# EAGLE board Version 3 (EAGLE 7.3.0)
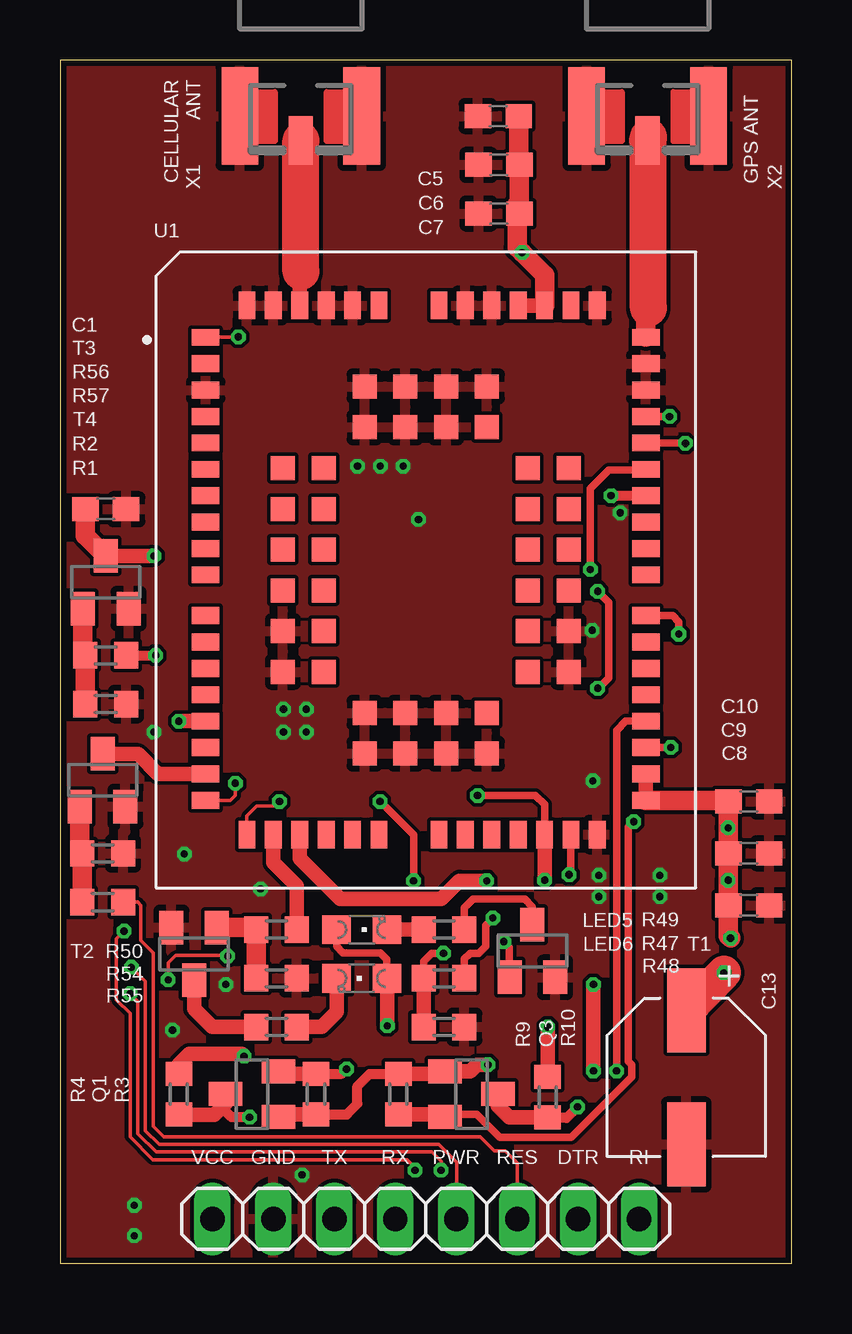
[diagram p0: board, top side]
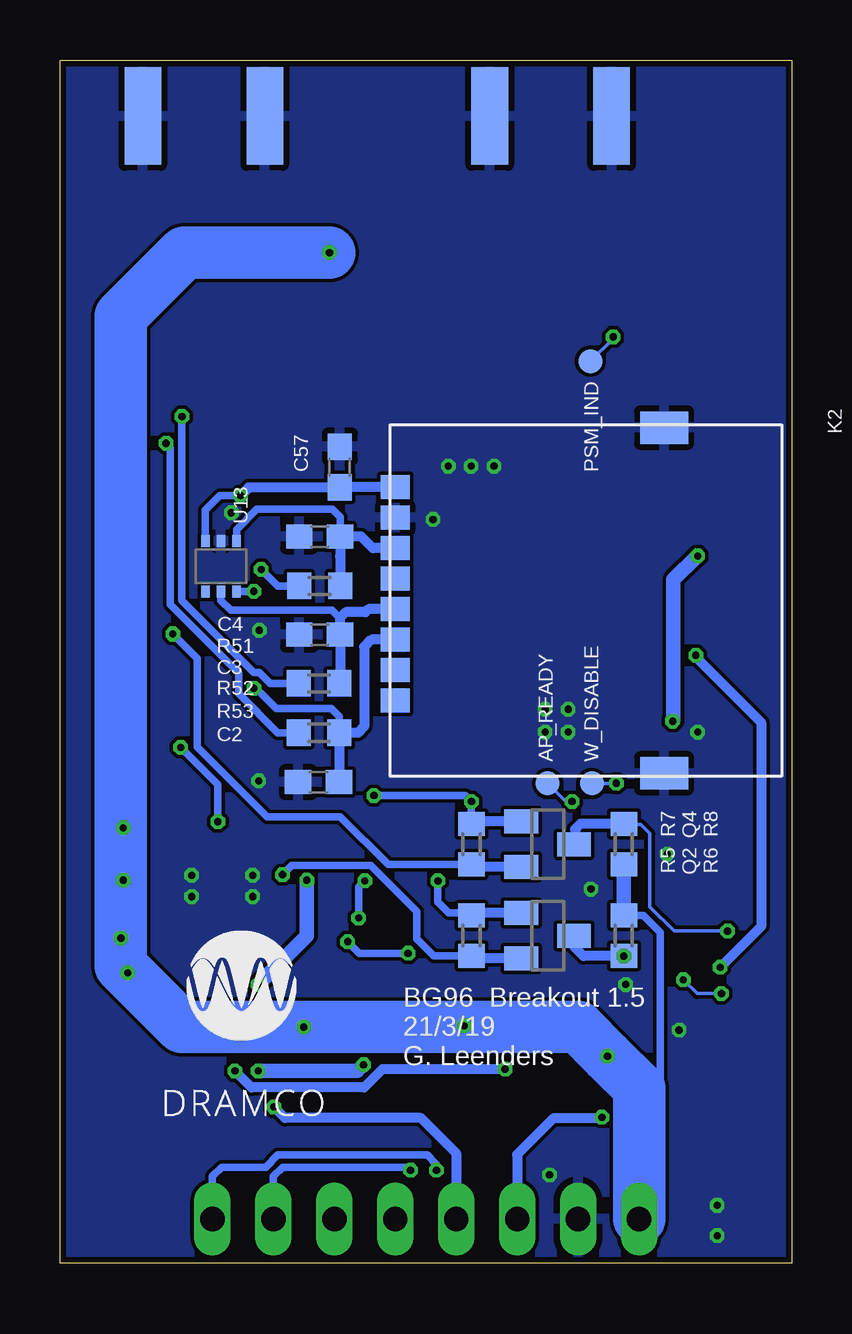
[diagram p1: board, bottom side, seen from below]

Size 30.48 x 50.15 mm. Coordinates in mm from the lower left corner, seen from the top.
Outline: 0,0 30.48,0 30.48,50.15 0,50.15 0,0
Copper layers (1*16): Top 0.035mm / dielectric 1.5mm / Bottom 0.035mm
Design rules "SeeedStudio_2layer_DRU_no_angle_20140221": minimum track width 6mil, minimum drill 12mil, track to track 6mil, track to pad 6mil, pad to pad 6mil, via to via 6mil, smd to smd 0mil, copper to edge 10mil, drill to drill 10mil, minimum pad ring 10mil, minimum via ring 6mil, stop-mask expansion 2mil, vias tented up to drill 100mil, thermal gap 10mil

## Footprints (pad centres in the part's own frame; a part is rotated, then mirrored left to right if it is on the bottom)
TP10R = smd 1 x 1: TP 0,0
C0603 = smd 1.1 x 1: 1 -0.85,0; 2 0.85,0
3.5X1.6X2.1(BXCXA) = smd 3.5 x 1.6: 1 2.8,0; 2 -2.8,0
1X08 = drill 1.016 long: 1 -8.89,0; 2 -6.35,0; 3 -3.81,0; 4 -1.27,0; 5 1.27,0; 6 3.81,0; 7 6.35,0; 8 8.89,0
693022010811 = smd 1 x 1.2: C1 -4.72,0; C2 -2.18,0; C3 0.36,0; C4 2.9,0; C5 -3.45,0; C6 -0.91,0; C7 1.63,0; C8 4.17,0 | smd 1.35 x 2: Z1 7.2,11.2; Z2 -7.2,11.2
CHIPLED_0805 = smd 1.2 x 1.2: A 0,-1.05; C 0,1.05
SOT23 = smd 1 x 1.4: 1 -0.95,-1.1; 2 0.95,-1.1; 3 0,1.1
R0603 = smd 1 x 1.1: 1 -0.85,0; 2 0.85,0
LTE_MODULE_BG96 = smd 1.15 x 0.7: 1 -9.175,9.7; 2 -9.175,8.6; 3 -9.175,7.5; 4 -9.175,6.4; 5 -9.175,5.3; 6 -9.175,4.2; 7 -9.175,3.1; 8 -9.175,2; 9 -9.175,0.9; 10 -9.175,-0.2; 11 -9.175,-1.9; 12 -9.175,-3; 13 -9.175,-4.1; 14 -9.175,-5.2; 15 -9.175,-6.3; 16 -9.175,-7.4; 17 -9.175,-8.5; 18 -9.175,-9.6; 32 9.175,-9.6; 33 9.175,-8.5; 34 9.175,-7.4; 35 9.175,-6.3; 36 9.175,-5.2; 37 9.175,-4.1; 38 9.175,-3; 39 9.175,-1.9; 40 9.175,-0.2; 41 9.175,0.9; 42 9.175,2; 43 9.175,3.1; 44 9.175,4.2; 45 9.175,5.3; 46 9.175,6.4; 47 9.175,7.5; 48 9.175,8.6; 49 9.175,9.7 | smd 0.7 x 1.15: 19 -7.45,-11.025; 20 -6.35,-11.025; 21 -5.25,-11.025; 22 -4.15,-11.025; 23 -3.05,-11.025; 24 -1.95,-11.025; 25 0.55,-11.025; 26 1.65,-11.025; 27 2.75,-11.025; 28 3.85,-11.025; 29 4.95,-11.025; 30 6.05,-11.025; 31 7.15,-11.025; 50 7.15,11.025; 51 6.05,11.025; 52 4.95,11.025; 53 3.85,11.025; 54 2.75,11.025; 55 1.65,11.025; 56 0.55,11.025; 57 -1.95,11.025; 58 -3.05,11.025; 59 -4.15,11.025; 60 -5.25,11.025; 61 -6.35,11.025; 62 -7.45,11.025 | smd 1 x 1: 63 -5.95,4.25; 64 -5.95,2.55; 65 -5.95,0.85; 66 -5.95,-0.85; 67 -5.95,-2.55; 68 -5.95,-4.25; 69 -2.55,-7.65; 70 -0.85,-7.65; 71 0.85,-7.65; 72 2.55,-7.65; 73 5.95,-4.25; 74 5.95,-2.55; 75 5.95,-0.85; 76 5.95,0.85; 77 5.95,2.55; 78 5.95,4.25; 79 2.55,7.65; 80 0.85,7.65; 81 -0.85,7.65; 82 -2.55,7.65; 83 -4.25,4.25; 84 -4.25,2.55; 85 -4.25,0.85; 86 -4.25,-0.85; 87 -4.25,-2.55; 88 -4.25,-4.25; 89 -2.55,-5.95; 90 -0.85,-5.95; 91 0.85,-5.95; 92 2.55,-5.95; 93 4.25,-4.25; 94 4.25,-2.55; 95 4.25,-0.85; 96 4.25,0.85; 97 4.25,2.55; 98 4.25,4.25; 99 2.55,5.95; 100 0.85,5.95; 101 -0.85,5.95; 102 -2.55,5.95
SC-70-6 = smd 0.35 x 0.5: 1 -0.65,-1.05; 2 0,-1.05; 3 0.65,-1.05; 4 0.65,1.05; 5 0,1.05; 6 -0.65,1.05
SMA_EDGELAUNCH_UFL = smd 4.064 x 1.524: GND@1 2.032,-2.54; GND@2 2.032,2.54 | smd 4.064 x 1.524 bottom: GND@3 2.032,2.54; GND@4 2.032,-2.54 | smd 2.032 x 1.016: P 3.048,0

## Placement (x,y rotation side)
AP_READY  TPTP10R  [TP10R]  10.16,20 0 bottom
C1  10n  [C0603]  1.91,31.43 0 top
C2  33p  [C0603]  19.71,20.05 180 bottom
C3  33p  [C0603]  19.66,26.2 180 bottom
C4  33p  [C0603]  19.66,30.29 180 bottom
C5  100n  [C0603]  18.26,47.82 180 top
C6  33p  [C0603]  18.29,45.78 180 top
C7  10p  [C0603]  18.29,43.75 180 top
C8  100n  [C0603]  28.7,14.92 0 top
C9  33p  [C0603]  28.7,17.08 0 top
C10  10p  [C0603]  28.7,19.24 0 top
C13  [3.5X1.6X2.1(BXCXA)]  26.1,7.75 90 top
C57  100n  [C0603]  18.82,33.19 90 bottom
JP1  [1X08]  15.24,1.84 0 top
K2  693022010811  [693022010811]  16.51,27.62 270 bottom
LED5  [CHIPLED_0805]  12.57,13.91 270 top
LED6  [CHIPLED_0805]  12.57,11.87 90 top
PSM_IND  TPTP10R  [TP10R]  8.38,37.59 0 bottom
Q1  [SOT23]  8,7.05 90 top
Q2  [SOT23]  10.16,13.65 270 bottom
Q3  [SOT23]  17.14,7.05 270 top
Q4  [SOT23]  10.16,17.46 270 bottom
R1  4.7k  [R0603]  1.78,15.05 180 top
R2  47k  [R0603]  1.78,17.08 180 top
R3  10k  [R0603]  10.67,7.05 270 top
R4  10k  [R0603]  4.95,7.05 90 top
R5  10k  [R0603]  13.34,13.65 90 bottom
R6  10k  [R0603]  6.99,13.65 90 bottom
R7  10k  [R0603]  13.34,17.46 90 bottom
R8  10k  [R0603]  6.99,17.46 270 bottom
R9  10k  [R0603]  14.1,7.05 90 top
R10  10k  [R0603]  20.32,6.92 90 top
R47  4.7k  [R0603]  16,11.87 180 top
R48  47k  [R0603]  16,9.84 180 top
R49  2K2  [R0603]  16,13.91 180 top
R50  4.7k  [R0603]  9.02,13.91 180 top
R51  22  [R0603]  19.66,28.23 0 bottom
R52  22  [R0603]  19.68,24.17 0 bottom
R53  22  [R0603]  19.68,22.11 0 bottom
R54  47k  [R0603]  9.02,11.87 180 top
R55  2k2  [R0603]  9.02,9.84 0 top
R56  4.7k  [R0603]  1.91,25.34 180 top
R57  47k  [R0603]  1.91,23.3 180 top
T1  BC847  [SOT23]  19.68,13.02 0 top
T2  BC847  [SOT23]  5.59,12.89 180 top
T3  BC847  [SOT23]  1.91,28.38 0 top
T4  BC847  [SOT23]  1.78,20.13 0 top
U1  BG96  [LTE_MODULE_BG96]  15.24,28.89 0 top
U13  SMF05C  [SC-70-6]  23.77,29.04 180 bottom
W_DISABLE  TPTP10R  [TP10R]  8.32,20 0 bottom
X1  [SMA_EDGELAUNCH_UFL]  10.03,49.85 270 top
X2  [SMA_EDGELAUNCH_UFL]  24.49,49.85 270 top

## Library data of the parts
AP_READY PSM_IND W_DISABLE = testpad
C1-C10 C57 R1-R10 R47-R57 = rcl
C13 = Kondensatoren (rev17a); WE-NUMBER: 865080545012/100uF
JP1 = pinhead
K2 = Wurth_Elektronik_Electromechanic_Input-Output_Connectors_rev15c
LED5 LED6 Q1-Q4 X1 X2 = adafruit
T1-T4 = transistor
U1 = BG96; AVAILABILITY: Unavailable; DESCRIPTION: Lte Cat.M1 Module For Global Sku; MF: Quectel; MP: BG96; PACKAGE: None; PRICE: None
U13 = Design 13

## Nets
BG96_PWR: C1.1 T3.3 U1.15
BG96_RESET: T4.3 U1.17
DTR: JP1.7 Q2.3 R6.1
DTR_1.8: Q2.2 R5.1 U1.30
GND: C1.2 C2.2 C3.2 C4.2 C5.2 C6.2 C7.2 C8.2 C9.2 C10.2 C13.2 C57.2 JP1.2 K2.C5 K2.Z1 K2.Z2 R2.1 R48.1 R54.1 R57.1 T1.2 T2.2 T3.2 T4.2 U1.3 U1.31 U1.47 U1.48 U1.50 U1.54 U1.55 U1.58 U1.59 U1.61 U1.62 U1.67 U1.68 U1.69 U1.70 U1.71 U1.72 U1.73 U1.74 U1.79 U1.80 U1.81 U1.82 U1.89 U1.90 U1.91 U1.100 U1.101 U1.102 U13.2 X1.GND@1 X1.GND@2 X1.GND@3 X1.GND@4 X2.GND@1 X2.GND@2 X2.GND@3 X2.GND@4
N$1: U1.60 X1.P
N$2: U1.49 X2.P
N$3: R1.2 R2.2 T4.1
N$4: AP_READY.TP U1.19
N$5: U1.18 W_DISABLE.TP
N$29: R56.2 R57.2 T3.1
N$30: C4.1 K2.C2 R51.2 U13.1
N$31: C3.1 K2.C3 R52.2 U13.5
N$32: C2.1 K2.C7 R53.2 U13.6
N$33: R47.2 R48.2 T1.1
N$34: R49.1 T1.3
N$35: LED5.C R49.2
N$36: R50.2 R54.2 T2.1
N$37: R55.1 T2.3
N$38: LED6.C R55.2
NETLIGHT: R47.1 U1.21
PSM_IND: PSM_IND.TP U1.1
PWR: JP1.5 R56.1
RESET: JP1.6 R1.1
RI: JP1.8 Q4.3 R8.1
RI_1.8: Q4.2 R7.1 U1.39
RX: JP1.4 Q3.3 R10.1
RX_1.8: Q3.2 R9.1 U1.34
SIM_CLK: R52.1 U1.46
SIM_DATA: R53.1 U1.45
SIM_RST: R51.1 U1.44
SIM_VDD: C57.1 K2.C1 U1.43 U13.3
STATUS: R50.1 U1.20
TX: JP1.3 Q1.3 R4.1
TX_1.8: Q1.2 R3.1 U1.35
USB_VBUS: U1.8
VBAT: C5.1 C6.1 C7.1 C8.1 C9.1 C10.1 C13.1 JP1.1 LED5.A LED6.A R4.2 R6.2 R8.2 R10.2 U1.32 U1.33 U1.52 U1.53
VDD_EXT: Q1.1 Q2.1 Q3.1 Q4.1 R3.2 R5.2 R7.2 R9.2 U1.29

## Tracks (layer width: path | path; a pad name or v marks a point on that pad's centre or on a via)
BG96_PWR  (via drill 0.3)
  Top 0.61: T3.3 3.9,29.48 v3.91,29.48 | v4.95,22.59 U1.15
  Top 0.813: C1.1 1.05,30.33 T3.3
  Bottom 0.61: v3.91,29.48 3.94,29.48 4.93,28.49 4.93,22.62 v4.95,22.59
BG96_RESET
  Top 0.61: U1.17 4.08,20.39 3.25,21.22 T4.3
DTR  (via drill 0.3)
  Top 0.152: v15.88,3.87 15.88,4.25 15.49,4.64 4,4.64 3.24,5.4 3.24,10.92 v2.92,11.24 | v4.51,11.81 4.51,12.51 4.83,12.83 6.96,12.83 R6.1
  Bottom 0.152: v2.92,11.24 3.94,11.24 v4.51,11.81
  Bottom 0.305: JP1.7 21.59,3.62 21.21,4 16,4 v15.88,3.87
  Bottom 0.406: R6.1 7.49,12.8 8.68,12.8 9.02,13.14 9.02,13.61 Q2.3
  other vias: 6.99,12.8
DTR_1.8  (via drill 0.3)
  Top 0.305: U1.30 21.29,16.27 v21.21,16.19
  Bottom 0.305: R5.1 14.9,12.8 15.62,13.53 15.62,14.67 17.53,16.57 20.83,16.57 20.89,16.51 v21.21,16.19
  Bottom 0.406: Q2.2 13.23,12.7 R5.1
GND  (via drill 0.3)
  other vias: 6.91,11.62 3.91,22.14 14.94,31 23.34,31.28 22.17,26.38 3.1,1.14 3.1,2.41 10.08,3.68 4.69,9.72 9.31,23.09 9.31,22.14 10.26,23.09 10.26,22.14 14.3,33.22 13.35,33.22 12.4,33.22 22.45,16.17 22.45,15.28 24.99,16.17 24.99,15.28 5.18,17.06 22.2,20.1 8.36,15.6
  pour Bottom: -6.35,-5.4 -6.35,73.34 71.12,73.34 71.12,-11.75 -6.35,-11.75
  pour Top: 71.12,-5.4 71.12,73.34 -6.35,73.34 -6.35,-11.75 71.12,-11.75
N$1
  Top 0.61: U1.60 9.99,41.04 10.03,41.34
  Top 1.54: 10.03,41.34 X1.P
N$2
  Top 0.813: U1.49 24.41,39.53 24.51,39.81
  Top 1.54: 24.51,39.81 24.51,46.95 X2.P
N$3
  Top 0.813: T4.1 0.83,17.18 R2.2 R1.2
N$4  (via drill 0.3)
  Top 0.152: U1.19 7.79,18.65 8.19,19.05 8.95,19.05 v9.14,19.24
  Bottom 0.152: v9.14,19.24 9.4,19.24 AP_READY.TP
N$5  (via drill 0.3)
  Top 0.152: U1.18 7.1,19.29 7.3,19.49 v7.3,20
  Bottom 0.152: v7.3,20 W_DISABLE.TP
N$29
  Top 0.813: T3.1 0.95,25.44 R56.2 R57.2
N$30
  Bottom 0.305: C4.1 18.8,30.3 18.8,31.1 19.13,31.43 22.28,31.43 23.12,30.58 U13.1
  Bottom 0.406: K2.C2 17.45,29.8 17.93,30.29 C4.1 | C4.1 R51.2 | C4.1 18.81,29.46
N$31
  Bottom 0.305: U13.5 23.77,27.62 23.37,27.22 19.15,27.22 18.82,26.89
  Bottom 0.406: K2.C3 17.63,27.26 17.75,27.14 18.57,27.14 18.82,26.89 18.82,26.21 C3.1 18.81,24.19 R52.2
N$32  (via drill 0.3)
  Top 0.305: v22.4,23.96 22.43,23.96 22.86,24.4 22.86,27.55 v22.4,28
  Bottom 0.305: U13.6 22.41,27.99 v22.4,28 | v22.4,23.96 22.4,24.07 21.46,23.13 19.18,23.13 18.85,22.8 18.85,22.12 R53.2
  Bottom 0.406: 18.85,22.12 18.85,20.07 C2.1 | K2.C7 17.5,25.99 17.8,25.69 17.8,22.36 18.06,22.11 R53.2
N$33  (via drill 0.3)
  Top 0.305: 15.15,12.07 R47.2 15.15,12.57 15.49,12.92 v15.98,12.92 | v18.49,13.4 18.72,13.17 T1.1
  Top 0.61: R47.2 R48.2
  Bottom 0.305: v15.98,12.92 18.01,12.92 v18.49,13.4
N$34
  Top 0.305: R49.1 16.85,14.81 17.22,15.18 19.36,15.18 19.68,14.85 T1.3
  Top 0.406: 19.47,13.91 T1.3
N$35
  Top 0.61: LED5.C R49.2
N$36
  Top 0.813: T2.1 8.08,13.99 R50.2 R54.2
N$37
  Top 0.61: T2.3 5.59,10.6 6.35,9.84 R55.1
N$38
  Top 0.61: LED6.C 11.52,10.47 10.9,9.84 R55.2
NETLIGHT  (via drill 0.3)
  Top 0.305: 16.85,12.04 16.85,12.67 17.09,12.92 17.45,12.92 17.73,13.2 17.73,14.08 v18.03,14.39
  Top 0.406: R47.1 16.85,12.04
  Top 0.61: U1.21 9.99,16.87 11.68,15.18 15.88,15.18 16.64,15.94 v17.78,15.94
  Bottom 0.305: v18.03,14.39 18.03,15.68 v17.78,15.94
PSM_IND  (via drill 0.3)
  Top 0.152: U1.1 7.41,38.59 v7.43,38.61
  Bottom 0.152: v7.43,38.61 7.43,38.54 PSM_IND.TP
PWR  (via drill 0.3)
  Top 0.152: v2.97,12.33 3.56,11.75 3.56,5.52 4.13,4.95 15.79,4.95 16.54,4.2 16.54,1.87 JP1.5
  Top 0.406: R56.1 v3.99,25.34
  Bottom 0.406: v3.99,25.34 3.99,25.26 1.27,22.54 1.27,14.03 v2.97,12.33
RESET
  Top 0.152: JP1.6 19.05,4.18 18.54,4.69 18.09,4.69 17.5,5.27 4.32,5.27 3.89,5.7 3.89,12.94 3.37,13.46 3.37,14.92 3.24,15.05 R1.1
RI  (via drill 0.3)
  Top 0.152: v14.8,3.87 14.8,4 14.48,4.32 3.87,4.32 2.92,5.27 2.92,10.41 2.35,10.99 2.35,13.53 v2.67,13.84
  Bottom 0.152: v2.67,13.84 4.89,13.84 5.91,14.86 5.91,17.91 6.29,18.29 6.96,18.29 R8.1
  Bottom 0.305: JP1.8 24.13,3.62 23.75,4 21.91,4 21.4,4.51 15.18,4.51 14.8,4.13 v14.8,3.87
  Bottom 0.406: R8.1 8.8,18.31 9.02,18.1 9.02,17.51 Q4.3
RI_1.8  (via drill 0.3)
  Top 0.305: v25.78,26.23 25.78,26.73 25.53,26.99 U1.39
  Bottom 0.305: R7.1 16.8,16.61 18.8,18.61 21.84,18.61 24.77,21.53 24.77,25.21 v25.78,26.23
  Bottom 0.406: Q4.2 13.23,16.51 R7.1
RX  (via drill 0.3)
  Top 0.406: v21.57,6.52 21.11,6.06 20.33,6.06 R10.1
  Top 0.61: Q3.3 18.25,6.56 18.72,6.08 20.31,6.08 R10.1
  Bottom 0.406: v21.57,6.52 21.11,6.06 15.44,6.06 13.97,4.58 JP1.4
RX_1.8  (via drill 0.3)
  Top 0.305: 15.95,6.2 17.36,6.2 18.31,5.25 21.31,5.25 23.82,7.76 23.82,8.27 23.67,8.42 23.67,18.17 v23.9,18.4 | v25.45,21.5 24.42,21.5 U1.34
  Top 0.61: R9.1 15.95,6.2 Q3.2
  Bottom 0.305: v23.9,18.4 23.9,19.95 v25.45,21.5
SIM_CLK  (via drill 0.3)
  Top 0.305: v25.4,35.29 U1.46
  Bottom 0.305: v25.4,35.29 25.4,27.62 22.4,24.63 22.17,24.63 21.72,24.17 R52.1
SIM_DATA  (via drill 0.3)
  Top 0.305: 24.42,34.2 U1.45 24.43,34.18 v26.06,34.18
  Bottom 0.305: R53.1 21.41,22.11 23.04,23.74 23.04,24.6 25.88,27.44 25.88,34 v26.06,34.18
SIM_RST  (via drill 0.3)
  Top 0.305: U1.44 24.38,33.06 22.86,33.06 22.1,32.3 v22.1,28.92
  Bottom 0.305: R51.1 21.41,28.23 v22.1,28.92
SIM_VDD  (via drill 0.3)
  Top 0.305: U1.43
  Top 0.406: v22.96,31.99 U1.43
  Bottom 0.305: U13.3 24.42,31.39 23.82,31.99 v22.96,31.99
  Bottom 0.406: K2.C1 C57.1 22.62,32.34 v22.96,31.99
STATUS
  Top 0.61: U1.20 8.89,16.7 9.87,15.72 R50.1
TX  (via drill 0.3)
  Top 0.406: v7.9,6.08 7.14,6.08 6.73,6.49
  Top 0.61: Q1.3 6.9,6.66 6.73,6.49 6.43,6.18 4.97,6.18 R4.1
  Bottom 0.406: v7.9,6.08 7.92,6.06 9.91,6.06 11.43,4.53 JP1.3
TX_1.8  (via drill 0.3)
  Top 0.305: v23.19,8.01 23.19,22.21 23.57,22.59 U1.35
  Top 0.406: R3.1 11.75,7.9 v11.94,8.09
  Top 0.61: R3.1 9.2,7.9 Q1.2
  Bottom 0.406: v11.94,8.09 17.04,8.09 17.8,7.33 22.5,7.33 v23.19,8.01
VBAT  (via drill 0.3)
  Top 0.305: LED5.A 11.52,13.2 11.79,12.94 13.34,12.94 13.61,12.66 13.61,11.88 LED6.A
  Top 0.61: R10.2 v20.32,9.84 | R4.2 4.95,8.29 5.38,8.72 7.57,8.72 v7.67,8.62 | v13.64,9.89 13.64,11.86 LED6.A | U1.33 U1.32 | U1.53 U1.52
  Top 0.813: U1.32 27.8,19.29 C10.1 C9.1 | C9.1 C8.1 | v27.84,18.15 27.84,17.1 C9.1 | v27.84,15.96 27.84,14.94 C8.1 | C8.1 27.85,13.64 v27.94,13.55 | U1.52 20.19,41.19 v19.25,42.13 19.05,42.33 19.05,44.13 19.14,44.04 C7.1 C6.1 19.11,45.81 C5.1
  Top 1.422: C13.1 26.1,10.49 v27.66,12.1
  Bottom 0.305: R6.2 6.18,14.5 5.46,13.78 5.46,7.56 6.35,7.3
  Bottom 0.61: 8.89,9.84 13.59,9.84 v13.64,9.89 | R8.2 R6.2
  Bottom 2.184: v19.25,42.13 25.3,42.13 27.94,39.48 v27.94,13.55 27.94,12.38 v27.66,12.1 25.4,9.84 v20.32,9.84 8.89,9.84 v7.67,8.62 6.35,7.3 JP1.1
VDD_EXT  (via drill 0.3)
  Top 0.305: v14.73,15.94 14.73,17.84 v13.34,19.24 | U1.29 20.19,19.12 19.81,19.49 v17.4,19.49
  Top 0.406: R3.2 11.95,6.2 12.39,6.64 12.39,7.38 12.9,7.89 14.09,7.89
  Top 0.61: 14.09,7.89 R9.2 15.95,7.9 Q3.1 16.05,7.99 17.09,7.99 17.37,8.27 v17.83,8.27 | R3.2 9.2,6.2 Q1.1 | U1.29 v20.19,15.97 v20.19,15.96 | v22.23,11.62 v22.23,8.01
  Bottom 0.305: 13.23,14.6 14.29,14.6 14.73,15.05 v14.73,15.94 | R7.2 v13.34,19.24 13.59,19.49 v17.4,19.49
  Bottom 0.406: Q2.1 13.23,14.6 R5.2 | Q4.1 13.23,18.41 R7.2
  Bottom 0.61: v20.19,15.96 20.19,13.65 v22.23,11.62 | v22.23,8.01 18.09,8.01 v17.83,8.27

## Text on the board
tNames: CELLULAR / ANT | GPS ANT | VCC | GND | TX | RX | PWR | RES | DTR | RI
bNames: BG96 Breakout 1.5 / 21/3/19 / G. Leenders